# Altium PCB MPU_HMC.PcbDoc
Units mil, origin at the board's own origin, x right, y up, seen from the top; angles counter-clockwise.
Board outline 6000 x 4000 mil, 2 copper layers (Top Layer, Bottom Layer); 17 components, 15 nets, 86 pads, 24 vias.
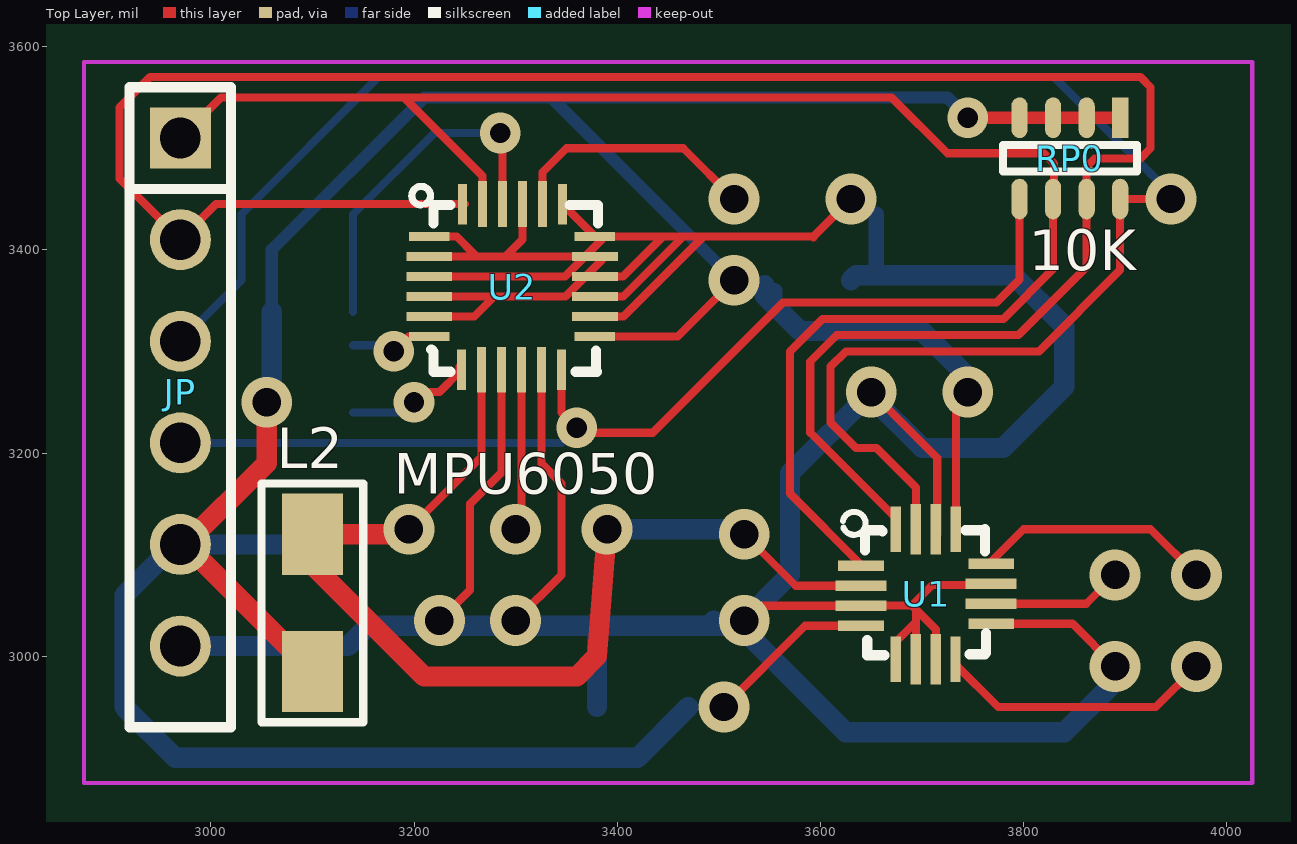
[diagram p0: Top Layer view]
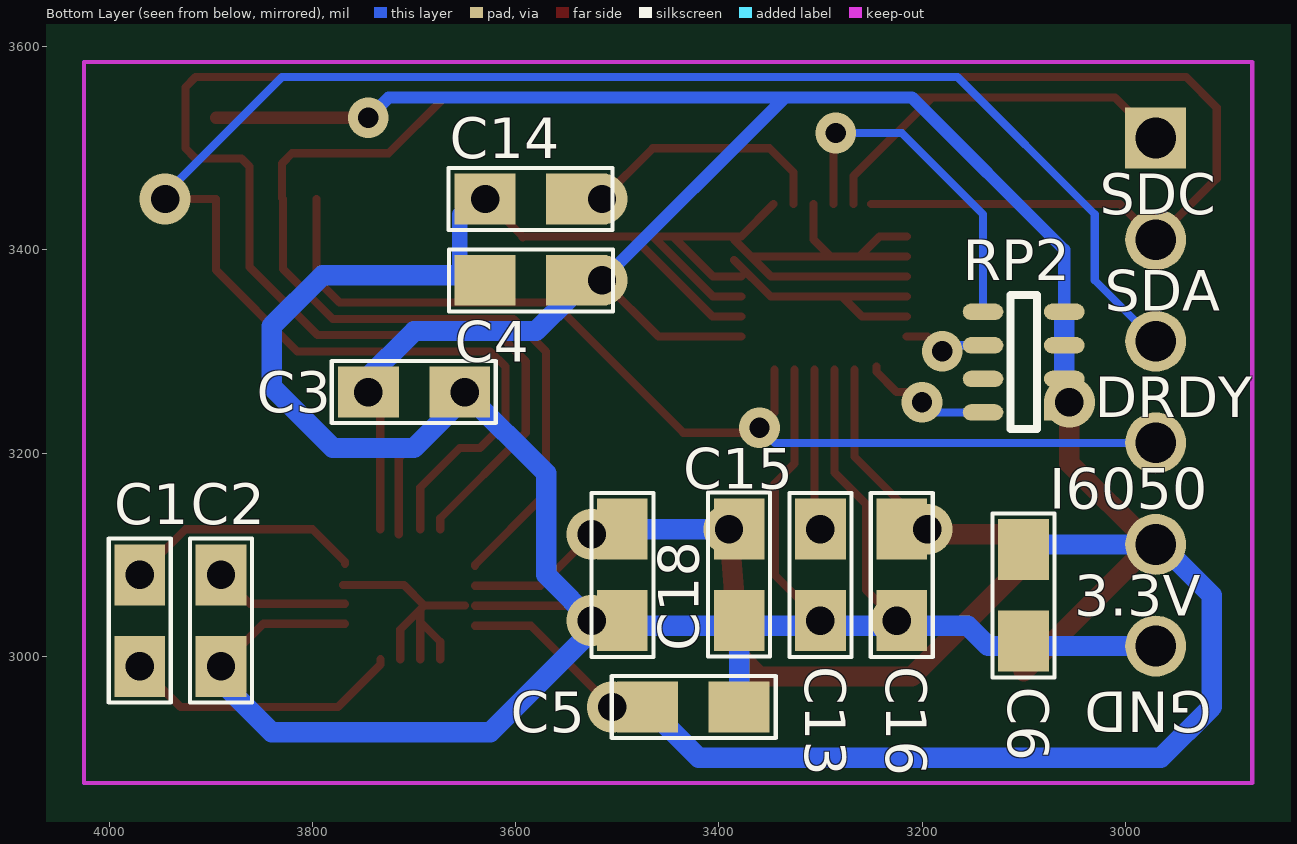
[diagram p1: Bottom Layer view, seen from below]

## Layer stack, top to bottom
Top Layer: signal copper 1.4
Dielectric: dielectric 12.6, FR-4, Dk 4.8
Bottom Layer: signal copper 1.4

## Board outline
1000,1000 7000,1000 7000,5000 1000,5000

## Design rules (kind name [scope] priority, off if disabled: settings)
Clearance [All] p1: gap=8
ComponentClearance [All] p1: gap=10 collisioncheckmode=3 verticalgap=10
PolygonConnect [All] p1: connectstyle=Relief reliefconductorwidth=10 reliefentries=4 polygonreliefangle="90 Angle"
RoutingVias [All] p1: holewidth=28 width=50 viastyle="Through Hole" minholewidth=20 minwidth=40 maxholewidth=28 maxwidth=50
SolderMaskExpansion [All] p1: expansion=4
TestPointUsage [All] p1: valid=0 allowmultiple=FALSE
Testpoint [All] p1: side=15 testpointundercomponent=TRUE minsize=40 maxsize=100 preferedsize=60 minholesize=0 maxholesize=40 preferedholesize=32 testpointgrid=1 style=1023 order=0-112345678
Width [All] p1: maxlimit=20 minlimit=8 preferedwidth=10 minimp=50.000000 maximp=50.000000 favimp=50.000000
18 further rules are at their usual default settings.

## Components (designator, comment, footprint, x,y, rotation, side; value= is the part's Value field where it differs from the comment)
C1 "0.22u" RC100 3980,3000 r90 bottom
C2 "4.7u" RC100 3900,3000 r90 bottom
C3 "0.1u" RC100 3665,3250 r0 bottom
C4 "0.1u" RC100 3620,3380 r180 bottom
C5 "0.1u" RC100 3460,2960 r180 bottom
C6 "10u" RC100 3090,3095 r270 bottom
C13 "0.1u" RC100 3290,3115 r270 bottom
C14 "2.2n" RC100 3550,3440 r0 bottom
C15 "10n" RC100 3390,3045 r90 bottom
C16 "0.1u" RC100 3210,3115 r270 bottom
C18 "10u" RC100 3485,3115 r270 bottom
JP "6PIN" SIP6 2970,3510 r270 top
L2 "LH" 1206 3100,3120 r270 top
RP0 "10K" RN4 3895,3530 r270 top
RP2 "2K" RN4 3060,3240 r0 bottom
U1 "HMC5883L" LPCC-16 3645,3120 r0 top
U2 "MPU6050" QFN-24 3220,3440 r0 top

## Footprints (in the part's own frame and the unit in brackets; to place one, negate y for a bottom-side part, rotate by r counter-clockwise, add the part's x,y. Pads: shape width x height; smd on the part's side, far side on the other; paste and mask are expansions set on the pad)
1206 [mil]
  rect 80x60 smd: 1(0,0) 2(135,0)
  silkscreen extent -50,-50 185,50
LPCC-16 [mil]
  rect 45x10 smd: 1(-5,-31) 4(-5,-90.06) 9(123,-88) 12(123,-29)
  rect 50x10 smd: 2(-5,-50.68) 3(-5,-70.37) 10(123,-68.37) 11(123,-48.68)
  rect 10x45 smd: 5(29.19,-123) 8(88,-123) 13(88.25,5) 16(29.19,5)
  rect 10x50 smd: 6(48.88,-123) 7(68.56,-123) 14(68.56,5) 15(48.88,5)
  silkscreen extent -23,-119 118,22
QFN-24 [mil]
  rect 40x9 smd: 1(-5,-27) 6(-5,-125.43) 13(158,-125.43) 18(158,-27)
  rect 45x9 smd: 2(-5,-46.68) 3(-5,-66.37) 4(-5,-86.05) 5(-5,-105.74) 14(158,-105.74) 15(158,-86.05) 16(158,-66.37) 17(158,-46.68)
  rect 9x40 smd: 7(26.62,-158) 12(125.05,-158) 19(126.05,5) 24(27.62,5)
  rect 9x45 smd: 8(46.31,-158) 9(65.99,-158) 10(85.68,-158) 11(105.36,-158) 20(106.36,5) 21(86.68,5) 22(66.99,5) 23(47.31,5)
  silkscreen extent -22,-160 161,22
RC100 [mil]
  rect 60x50 smd: 1(-10,-10) 2(80,-10)
  silkscreen extent -45,-41 116,21
RN4 [mil]
  rect 40x16 smd: 1(0,0)
  oval 40x16 smd: 2(0,-33) 3(0,-66) 4(0,-99) 5(80,-99) 6(80,-66) 7(80,-33) 8(80,0)
  silkscreen extent 27,-116 53,17
SIP6 [mil]
  rect 60x60 hole 40: 1(0,0)
  round 60 hole 40: 2(100,0) 3(200,0) 4(300,0) 5(400,0) 6(500,0)
  silkscreen extent -50,-50 580,50

## Part data
C1 C2 C3 C4 C5 C6 C13 C14 C15 C16 C18: library part CAPA
RP0 RP2: library part RESPACK4

## Via types
v1: diameter 50, hole 28, Top Layer to Bottom Layer, 19 vias
v2: diameter 40, hole 20, Top Layer to Bottom Layer, 5 vias

## Nets (pads, with @x,y where several pads share a name; then routed paths per layer and width w, separated by ;. In a path a pad name is that pad's centre, name@x,y a point inside that pad or via, vN(x,y) a via of type N, cw(c..) or ccw(c..) an arc to the next point about the centre after c; other vN are vias at no path point)
AUXCL: RP2.8 U2.7 | length 126.6
  Top Layer w8: v2(3200,3250) 3210,3260 3225,3260 3245,3280 U2.7@3245,3285
  Bottom Layer w8: RP2.8 3190,3240 v2(3200,3250)
AUXDA: RP2.6 U2.6 | length 83.5
  Top Layer w8: v2(3180,3300) 3194.57,3314.57 U2.6
  Bottom Layer w8: RP2.6 3174,3306 v2(3180,3300)
CLK1: RP2.5 U2.22 | length 345
  Top Layer w8: v2(3285,3515) 3286.99,3513.01 U2.22
  Bottom Layer w8: RP2.5 3140,3435 3220,3515 v2(3285,3515)
CPOUT: C14.1 U2.20 | length 250.5
  Top Layer w8: U2.20 3326.36,3476.36 3350,3500 3465,3500 v1(3515,3450)
DRDY: JP.3 RP0.8 U1.15 | length 1824.2
  Top Layer w8: U1.15 3693.88,3166.12 3655,3205 3635,3205 3610,3230 3610,3285 3625,3300 3815,3300 3895,3380 RP0.8 v1(3945,3450)
  Bottom Layer w8: JP.3 3030,3370 3030,3435 3165,3570 3830,3570 3945,3455 v1(3945,3450)
GND: C2.1 C3.1 C4.1 C5.2 C6.2 C13.2 C14.2 C15.1 C16.2 C18.2 JP.6 U1.3 U1.5 U1.6 U1.7 U1.9 U1.11 U1.14 U2.1 U2.2 U2.3 U2.4 U2.5 U2.9 U2.11 U2.14 U2.15 U2.16 U2.17 U2.18 U2.19 U2.21 | length 4560.6
  Top Layer w8: U2.5 3259.26,3334.26 3278.95,3353.95 ; U2.4 3348.95,3353.95 U2.17@3385,3390 ; U2.3 3348.63,3373.63 U2.18@3385,3410 ; U2.2 U2.17@3368.32,3393.32 ; U2.1 3242,3413 3260,3395 ; v1(3225,3035) 3255,3065 3255,3150 3285.99,3180.99 U2.9 ; 3290,3393.32 3306.68,3409.99 U2.21 ; v1(3300,3035) 3345,3080 3345,3170 3325.36,3189.64 U2.11 ; U2.19 U2.18 3593,3413 ; U2.14 3406.26,3334.26 3485,3413 ; U2.15 3405.95,3353.95 3465,3413 ; U2.16 3405.63,3373.63 3445,3413 ; v1(3525,3035) 3539.63,3049.63 U1.3 ; 3593,3412 3593,3413 ; v1@3625,3445 3593,3413 ; U1.3@3650,3050 3690,3050 ; v1(3650,3260) 3715,3195 U1.14@3715,3120 ; U1.5 3674.19,3014.19 3693.88,3033.88 ; U1.6 3693.88,3046.12 ; U1.7 3713.56,3026.44 3690,3050 ; U1.9 3848,3032 v1(3890,2990) ; U1.11@3770,3070 3710,3070 3690,3050
  Bottom Layer w15: C4.1@3655,3375 C14.2@3655,3435
  Bottom Layer w20: JP.6 3135,3010 3155,3030 v1@3520,3030 ; C5.2 C15.1 ; C18.2@3490,3030 C18.2 ; C4.1 3635,3375 3790,3375 3840,3325 3840,3265 3780,3205 3700,3205 3650,3255 v1(3650,3260) 3570,3180 3570,3080 v1@3520,3030 ; C2.1@3885,2970 3840,2925 3625,2925 v1@3520,3030
  other v1: 3630,3450
INT6050: JP.4 RP0.5 U2.12 | length 1039.2
  Top Layer w8: U2.12 3345.05,3239.95 3365,3220 3435,3220 3563,3348 3773.37,3348 3796,3370.63 RP0.5
  Bottom Layer w8: JP.4 3345,3210 v2(3360,3225)
NetC1_1: C1.1 U1.8 | length 276
  Top Layer w8: U1.8 3733,2992 3775,2950 3930,2950 v1(3970,2990)
NetC1_2: C1.2 U1.12 | length 235.9
  Top Layer w8: U1.12 3768,3093 3800,3125 3925,3125 v1(3970,3080)
NetC2_2: C2.2 U1.10 | length 133.8
  Top Layer w8: U1.10 3861.63,3051.63 v1(3890,3080)
REGOUT: C13.1 U2.10 | length 159.4
  Top Layer w8: v1(3300,3125) 3305.68,3130.68 U2.10
SCL: JP.1 RP0.6 U1.1 U2.23 | length 1677.5
  Top Layer w8: JP.1 3010,3550 3670,3550 3725,3495 3820,3495 3830,3485 3830,3451 RP0.6 3829,3381 3780,3332 3602,3332 3570,3300 3570,3160 3640,3090 U1.1 ; 3190,3550 3267.31,3472.69 U2.23
SDA: JP.2 RP0.7 U1.16 U2.24 | length 2225.8
  Top Layer w8: U2.24@3250,3445 3005,3445 JP.2 2910,3470 2910,3540 2940,3570 3915,3570 3925,3560 3925,3500 3915,3490 3870,3490 3862,3482 3862,3383 3795,3316 3616,3316 3590,3290 3590,3220 3674.19,3135.81 U1.16
  Bottom Layer w8: JP.2 JP.2@2975,3410
VDA33: C15.2 C16.1 C18.1 L2.1 U1.2 U2.8 | length 1023.8
  Top Layer w8: v1(3195,3125) 3266.31,3196.31 U2.8 ; v1(3525,3120) 3575.68,3069.32 U1.2
  Top Layer w20: v1(3195,3125) 3190,3120 L2.1 3100,3090 3210,2980 3360,2980 3380,3000 v1(3390,3125)
  Bottom Layer w20: v1(3390,3125) C18.1@3505,3125
VDD33: C3.2 C4.2 C5.1 C6.1 JP.5 L2.2 RP0.1 RP0.2 RP0.3 RP0.4 RP2.1 RP2.2 RP2.3 RP2.4 U1.4 U1.13 U2.13 | length 3319.3
  Top Layer w8: U2.13 3459.57,3314.57 v1(3515,3370) ; v1(3505,2950) 3584.94,3029.94 U1.4 ; U1.13 3733.25,3248.25 v1@3750,3265
  Top Layer w12: v2(3745,3530) RP0.1
  Top Layer w20: JP.5 JP.5@2975,3110 ; v1(3055,3250) 3055,3190 JP.5@2975,3110 ; L2.2 JP.5@2975,3110
  Bottom Layer w12: RP2.4 3060,3400 3210,3550 3725,3550 v2(3745,3530) ; 3335,3550 v1(3515,3370)
  Bottom Layer w15: C4.2@3555,3355 C4.2@3555,3360
  Bottom Layer w20: RP2.1 RP2.4 ; C6.1 3095,3110 2965,3110 2915,3060 2915,2950 2965,2900 3420,2900 C5.1 ; C4.2@3545,3365 3545,3355 3580,3320 3700,3320 C3.2@3750,3270
  other v1: 3745,3260
pads on no net: RP2.7

## Keep-outs
Keep-Out Layer:
  lines w4: 2875,2875 4025,2875 4025,3585 2875,3585 2875,2875

## Silkscreen, mask and mechanical layers (free items; w line width, h text height)
Bottom Overlay:
  text "SDC" at 3025,3435 h40
  text "SDA" at 3020,3340 h40
  text "DRDY" at 3030,3235 h40
  text "I6050" at 3075,3145 h40
  text "3.3V" at 3050,3040 h40
  text "GND" at 2915,2965 h40 r180